# Altium PCB camera.PcbDoc
Units mm, origin at the board's own origin, x right, y up, seen from the top; angles counter-clockwise.
Board outline 85 x 80 mm, 4 copper layers (Top Layer, Gnd, DC Power, Bottom Layer), stack 1.782 mm thick; 98 components, 60 nets, 288 pads, 140 vias.
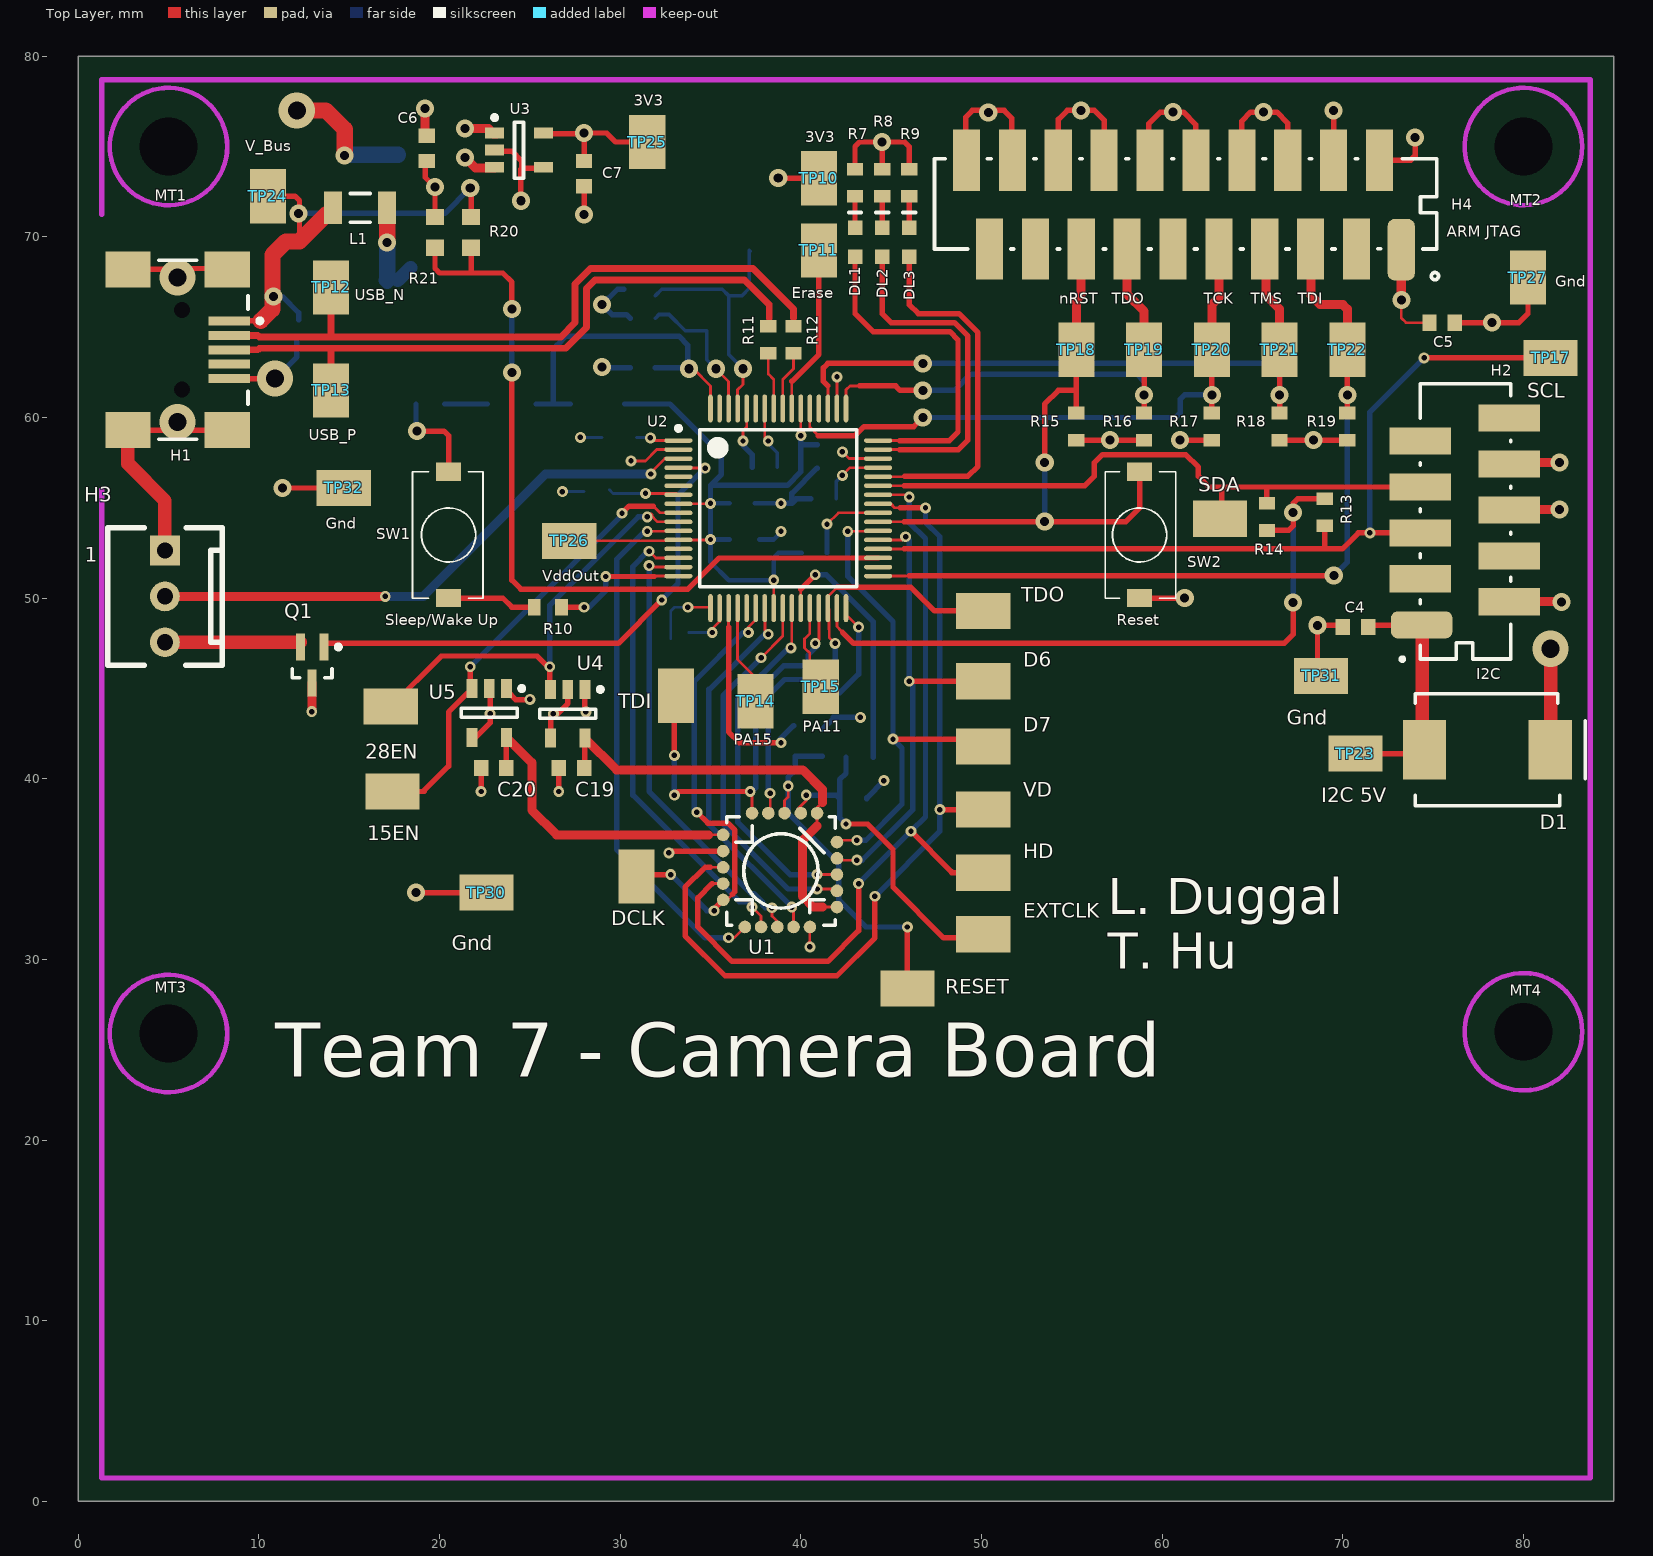
[diagram p0: Top Layer view]
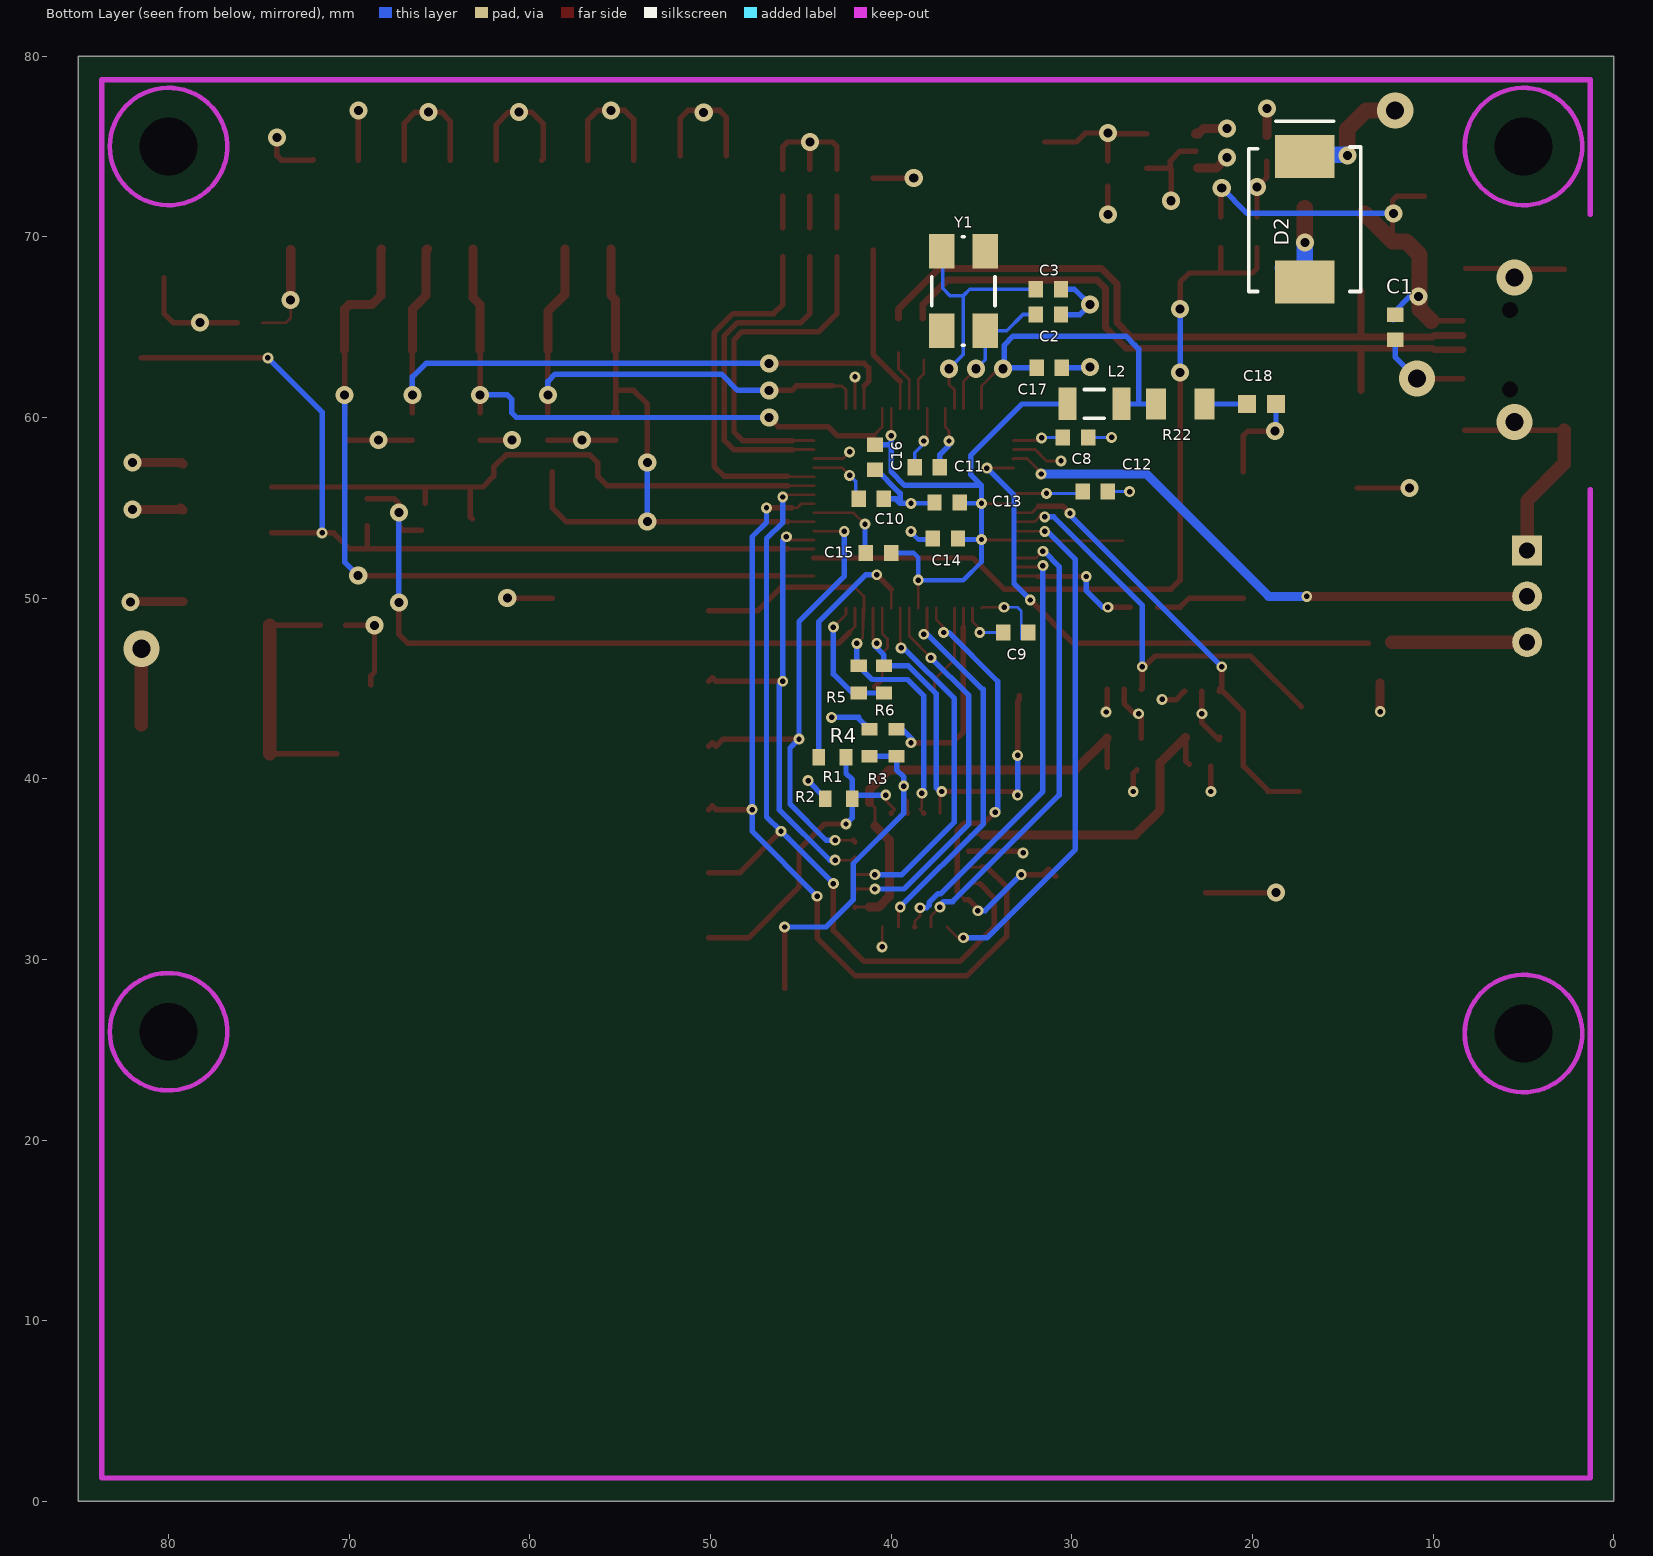
[diagram p1: Bottom Layer view, seen from below]
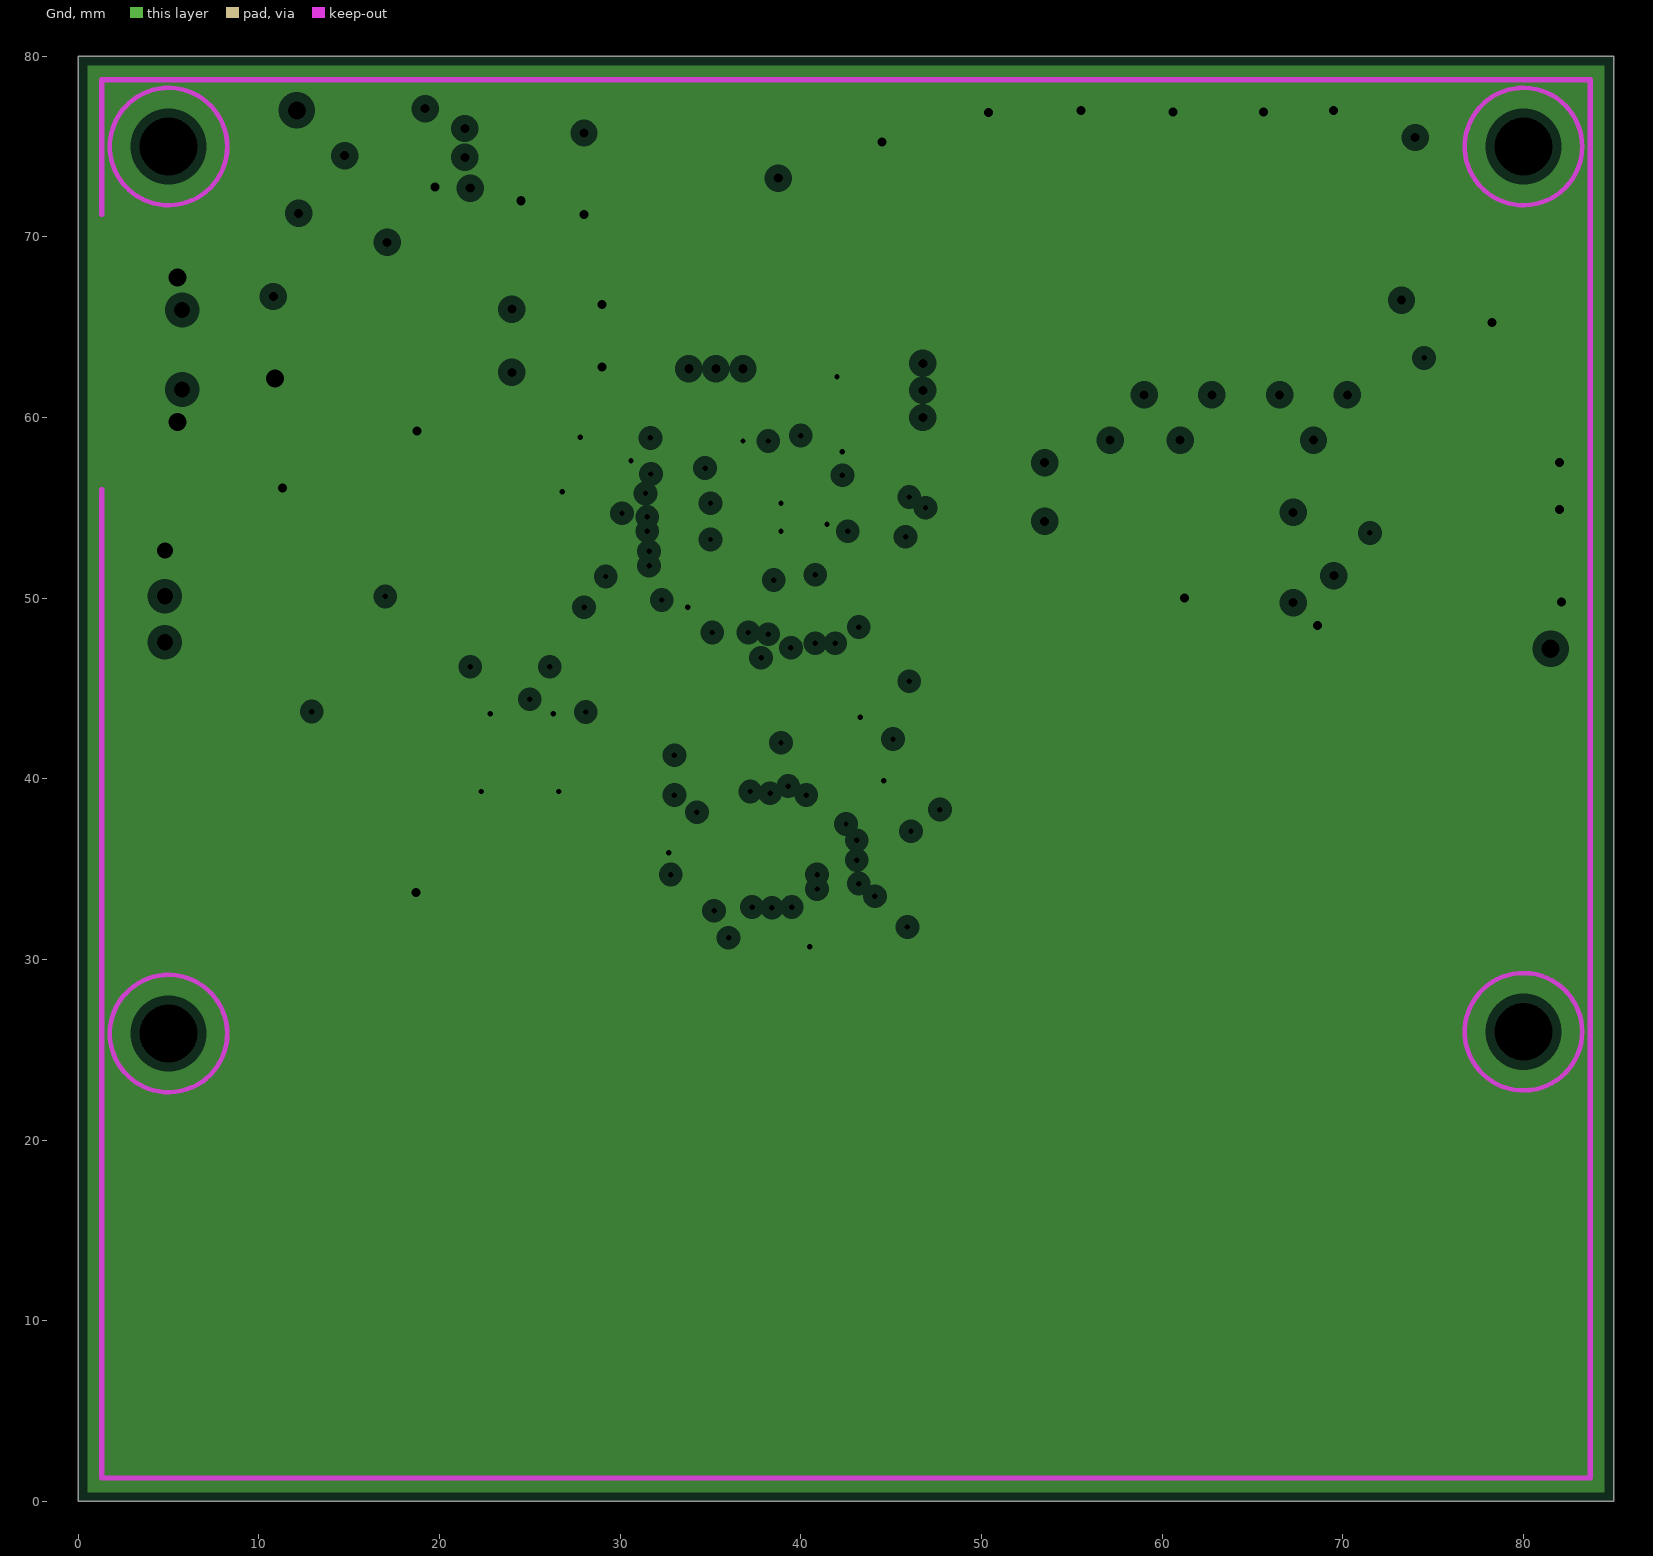
[diagram p2: Gnd, clearances drawn from the general rule]
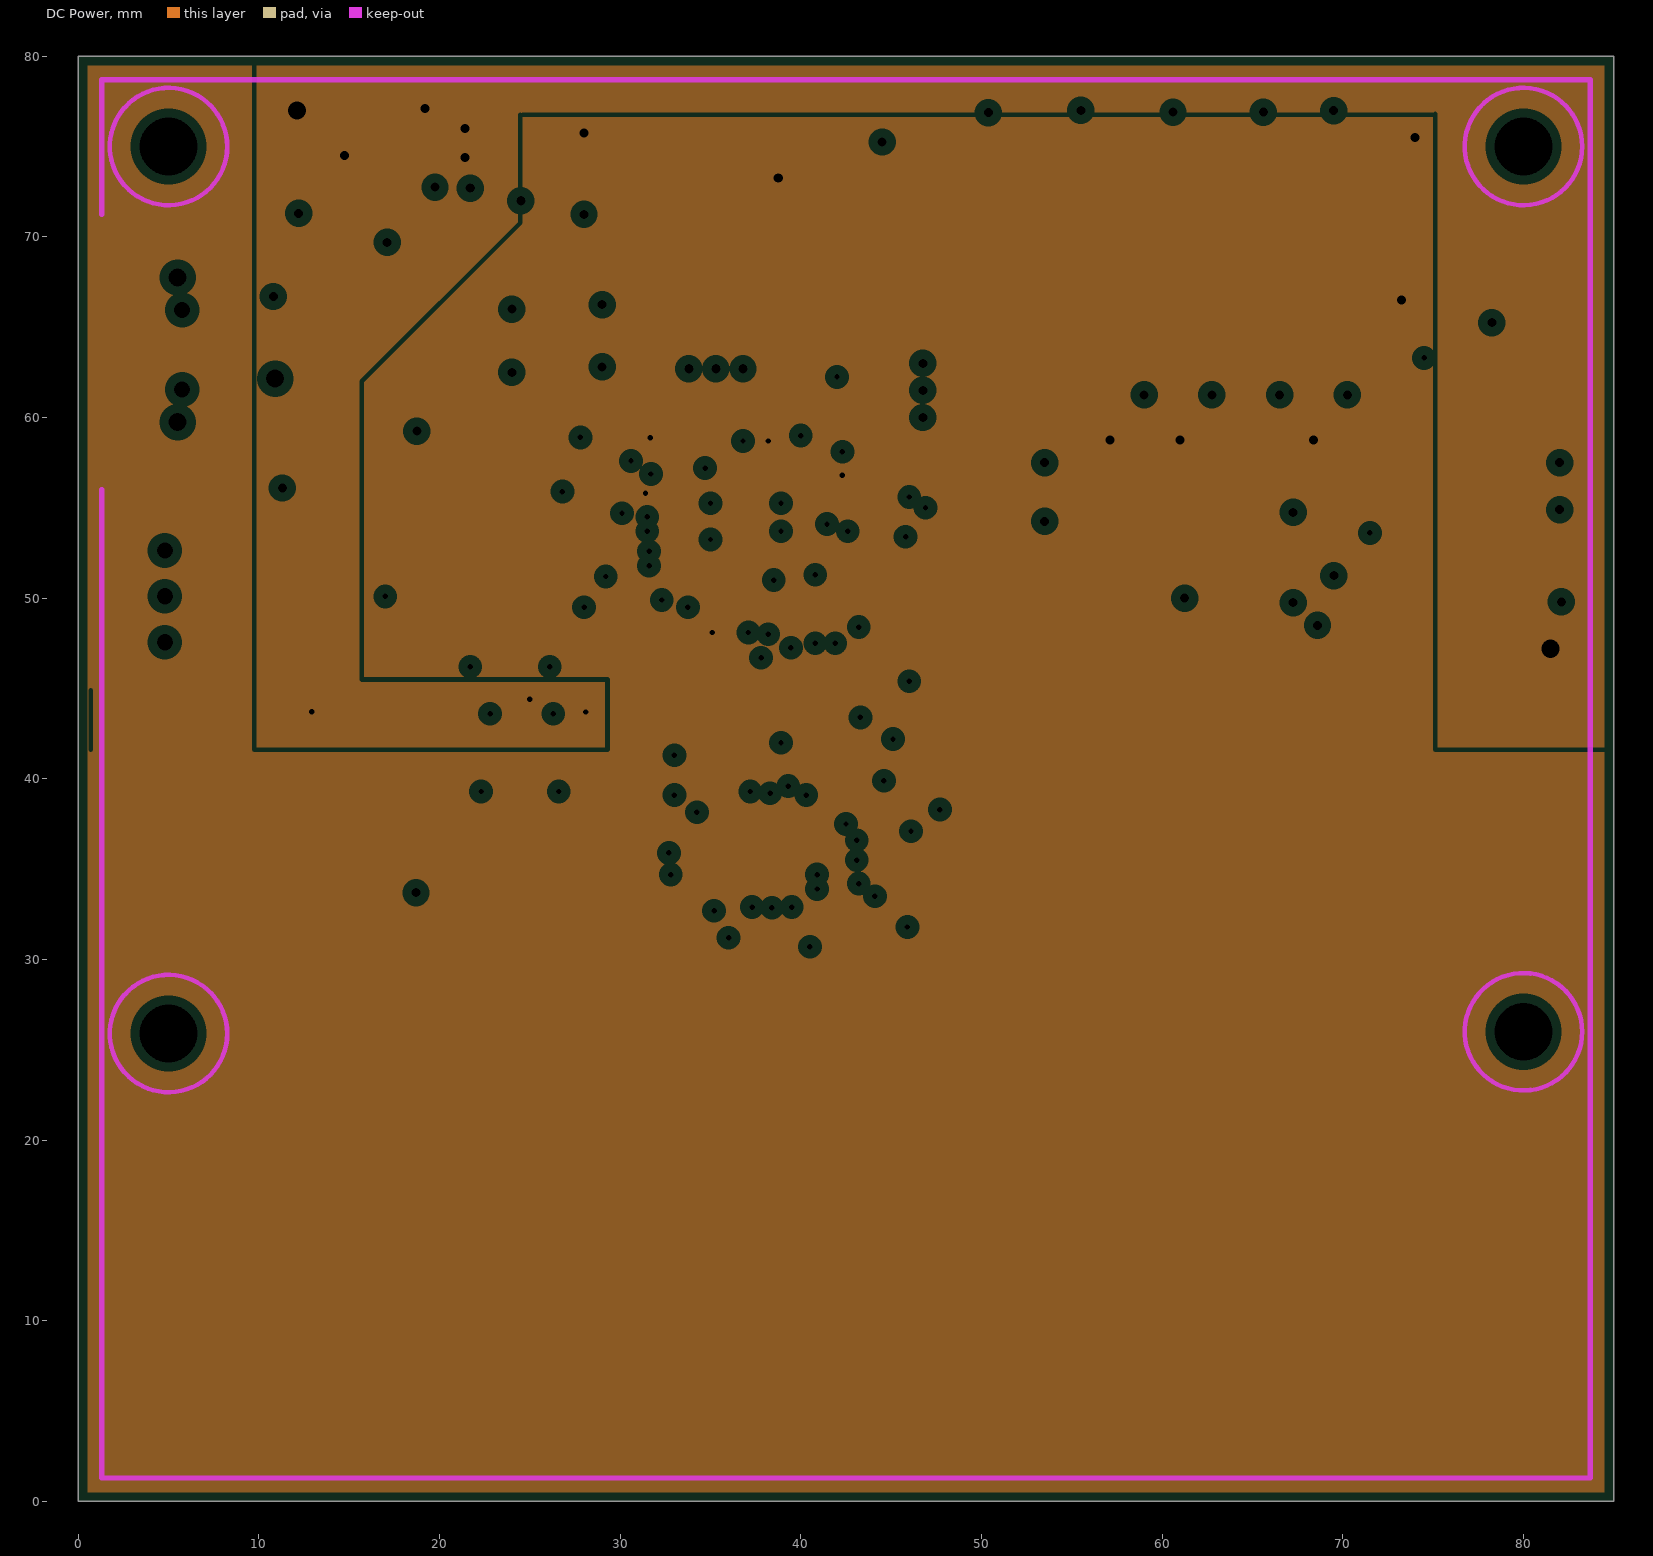
[diagram p3: DC Power, clearances drawn from the general rule]

## Layer stack, top to bottom
Top Solder: solder mask 0.0102, Solder Resist, Dk 3.5
Top Layer: signal copper 0.0356
Dielectric1: prepreg 0.32, FR-4, Dk 4.8
Gnd: plane copper 0.0356, net GND
Dielectric2: core 1, FR-4, Dk 4.8
DC Power: plane copper 0.0356, net (Multiple Nets)
Dielectric3: prepreg 0.32, FR-4, Dk 4.8
Bottom Layer: signal copper 0.0356
Bottom Solder: solder mask 0.0102, Solder Resist, Dk 3.5

## Board outline
0,0 85,0 85,80 0,80

## Design rules (kind name [scope] priority, off if disabled: settings)
Clearance Min_Clearance_Circuit_Labs [All] p1: gap=0.15
DiffPairsRouting [All] p1: maxlimit=0.254 minlimit=0.254 mostfreqgap=0.254 toplayer_minwidth=0.381 toplayer_maxwidth=0.381 toplayer_prefwidth=0.381 bottomlayer_minwidth=0.381 bottomlayer_maxwidth=0.381 bottomlayer_prefwidth=0.381 maxuncoupledlength=12.7
FanoutControl Fanout_BGA [IsBGA] p1 off: bgadir=Out bgaviamode=Centered fanoutstyle=Auto fanoutdirection=Alternating viagrid=0.025 // Fanout_BGA (Default Rule)
HoleSize [All] p1: absolutevalues=TRUE maxlimit=10 minlimit=0.3 maxpercent=80.000 minpercent=20.000
MinimumAnnularRing [All] p1: minimumring=0.1
MinimumSolderMaskSliver MinimumSolderMaskSliver_1 [(HasFootprint('USB/SM0.8-6H5') OR HasFootprint('SOT95P280X145-5N') OR HasFootprint('LQFP64_L'))] p1: minsoldermaskwidth=0.11
MinimumSolderMaskSliver [All] p2: minsoldermaskwidth=0.25
NetAntennae [All] p1: netantennaetolerance=1
PasteMaskExpansion [All] p1 off: expansion=0.2
PlaneClearance [All] p1: clearance=0.508
PlaneConnect [All] p1: planeconnectstyle=Relief reliefexpansion=0.508 reliefentries=4 reliefconductorwidth=0.254 reliefairgap=0.254
PolygonConnect [All] p1: connectstyle=Relief reliefconductorwidth=0.254 reliefentries=4 polygonreliefangle="90 Angle" airgapwidth=0.254
RoomDefinition Camera [InComponentClass('Camera')] p1: confinementstyle=ConfineIn formatcopy=TRUE lockcomponents=FALSE outline 1,3.9 87.1,3.9 87.1,51.4 1,51.4
RoomDefinition Camera_Board [InComponentClass('Camera_Board')] p2: confinementstyle=ConfineIn formatcopy=TRUE lockcomponents=FALSE outline -1.3,0.4 85.1,0.4 85.1,78.8 -1.3,78.8
RoomDefinition Power_Distribution [InComponentClass('Power_Distribution')] p3: confinementstyle=ConfineIn formatcopy=TRUE lockcomponents=FALSE outline 1,21.6 87,21.6 87,77.55 1,77.55
RoutingVias [All] p1: holewidth=0.5 width=1 viastyle="Through Hole" minholewidth=0.3 minwidth=0.6 maxholewidth=1 maxwidth=2
SMDNeckDown [All] p1 off: percent=50.000
SMDToCorner [All] p1: distance=98425
SMDToPlane [All] p1: distance=1968504
SilkToSolderMaskClearance SilkscreenOverComponentPads [IsPad] p1: minsilkscreentomaskgap=0.254 clearancetoexposedcopper=TRUE
SolderMaskExpansion [All] p1: expansion=0.102
ViasUnderSMD [All] p1: allowed=FALSE
Width [All] p1: maxlimit=2 minlimit=0.152 preferedwidth=0.3
21 further rules are at their usual default settings.

## Classes and differential pairs
component class Camera_Board: C1 C2 C3 C4 C5 DL1 DL2 DL3 H1 H2 H3 H4 MT1 MT2 MT3 MT4 Q1 R7 R8 R9 R10 R11 R12 R13 R14 R15 R16 R17 R18 R19 R20 R21 SDA SW1 SW2 TP10 TP11 TP12 TP13 TP14 TP15 TP17 TP18 TP19 TP20 TP21 TP22 Y1
component class Power_Distribution: C6 C7 C8 C9 C10 C11 C12 C13 C14 C15 C16 C17 C18 C19 C20 D1 D2 L1 L2 R22 TP23 TP24 TP25 TP26 TP27 TP28 TP29 TP30 TP31 TP32 U3 U4 U5
net class C1_Nets: GND VBUS
net class C2_Nets: GND NetC2_2
net class C3_Nets: GND NetC3_2
net class C4_Nets: +5V GND
net class C5_Nets: +3V3 GND
net class C6_Nets: +5IN GND
net class C7_Nets: +3V3 GND
net class C8_Nets: +3V3 GND
net class C9_Nets: +3V3 GND
net class C10_Nets: +3V3 GND
net class C11_Nets: +3V3 GND
net class C15_Nets: GND VDDOUT
net class C13_Nets: GND VDDOUT
net class C14_Nets: GND VDDOUT
net class C16_Nets: GND VDDOUT
net class DL1_Nets: LED1 NetDL1_1
net class DL2_Nets: LED2 NetDL2_1
net class DL3_Nets: LED3 NetDL3_1
net class H1_Nets: GND NetH1_4 USB_N USB_P VBUS
net class H2_Nets: +5V GND NetH2_3 NetH2_4 NetH2_9 NetH2_10 SCL SDA
net class H4_Nets: +3V3 GND NetH3_11 NetH3_17 NetH3_19 NRST TCK TDI TDO TMS
net class L1_Nets: NetD2_1 VBUS
net class L2_Nets: NetC17_2 VDDOUT
net class R7_Nets: GND NetDL1_1
net class R8_Nets: GND NetDL2_1
net class R3_Nets: NetR3_1 NetR3_2
net class R9_Nets: GND NetDL3_1
net class R5_Nets: NetR5_1 NetR5_2
net class R6_Nets: NetR5_2 NetR6_1
net class R15_Nets: +3V3 NRST
net class R16_Nets: +3V3 TDO
net class R17_Nets: +3V3 TCK
net class R18_Nets: +3V3 TMS
net class R19_Nets: +3V3 TDI
net class R14_Nets: NetR13_2 SDA
net class R21_Nets: GND "USB DETECT"
net class SW1_Nets: GND NetR10_2
net class SW2_Nets: GND NRST
net class TP10_Nets: +3V3
net class TP11_Nets: ERASE
net class TP12_Nets: USB_N
net class TP4_Nets: NetR3_1
net class TP13_Nets: USB_P
net class TP6_Nets: NetTP6_1
net class TP18_Nets: NRST
net class TP19_Nets: TDO
net class TP20_Nets: TCK
net class TP21_Nets: TMS
net class TP22_Nets: TDI
net class TP24_Nets: VBUS
net class TP25_Nets: +3V3
net class TP26_Nets: VDDOUT
net class TP32_Nets: GND
net class TP30_Nets: GND
net class U2_Nets: +3V3 ERASE GND LED1 LED2 LED3 NetC2_2 NetC3_2 NetC17_2 NetH3_2 NetR1_2 NetR3_2 NetR5_1 NetR5_2 NetR6_1 NetR10_1 NetR11_2 NetR12_2 NetR13_2 NetTP2_1 NetTP3_1 NetTP5_1 NetTP6_1 NetTP7_1 NetTP14_1 NetTP15_1 NetTP28_1 NetTP29_1 NetU1_3 NetU1_4 NetU1_5 NetU1_6 NetU1_9 NetU1_10 NetU1_11 NetU1_12 NetU1_13 NetU1_14 NetU1_15 NetU1_16 NetU1_17 NetU1_18 NetU1_19 NetU1_21 NetU1_22 NetU1_23 NetU1_25 NetU1_27 NetU1_29 NetU1_30 NetU1_32 NetU1_34 NetU1_37 NetU1_38 NetU1_41 NetU1_42 NetU1_52 NetU1_59 NetU1_63 NRST PWR SCL SDA TCK TDI TDO TMS "USB DETECT" VDDOUT
net class Y1_Nets: NetC2_2 NetC3_2
net class C17_Nets: GND NetC17_2
component class Camera: R1 R2 R3 R4 R5 R6 TDo TP1 TP2 TP3 TP4 TP5 TP6 TP7 TP9 U1
net class C12_Nets: +3V3 GND
net class C18_Nets: GND NetC18_2
net class C19_Nets: +2V8 GND
net class C20_Nets: +1V5 GND
net class D1_Nets: +5IN +5V
net class D2_Nets: +5IN NetD2_1
net class H3_Nets: GND NetH3_2 NetH3_3
net class Q1_Nets: +5IN NetH3_3 PWR
net class R1_Nets: NetR1_1 NetR1_2
net class R2_Nets: GND NetR1_1
net class R4_Nets: GND NetR3_1
net class R10_Nets: NetR10_1 NetR10_2
net class R11_Nets: NetR11_2 USB_P
net class R12_Nets: NetR12_2 USB_N
net class R13_Nets: NetR13_2 SCL
net class R20_Nets: "USB DETECT" VBUS
net class R22_Nets: NetC17_2 NetC18_2
net class TP1_Nets: NetR1_1
net class TP2_Nets: NetTP2_1
net class TP3_Nets: NetTP3_1
net class TP5_Nets: NetTP5_1
net class TP7_Nets: NetTP7_1
net class TP8_Nets: NetR5_1
net class TP9_Nets: NetR6_1
net class TP14_Nets: NetTP14_1
net class TP15_Nets: NetTP15_1
net class TP16_Nets: SDA
net class TP17_Nets: SCL
net class TP23_Nets: +5V
net class TP27_Nets: GND
net class TP28_Nets: NetTP28_1
net class TP29_Nets: NetTP29_1
net class TP31_Nets: GND
net class U1_Nets: +1V5 +2V8 GND NetR1_1 NetR3_1 NetR5_1 NetR6_1 NetTP2_1 NetTP3_1 NetTP5_1 NetTP6_1 NetTP7_1 NetU1_11 NetU1_12 NetU1_13 NetU1_14 NetU1_17 NetU1_18
net class U3_Nets: +3V3 +5IN GND
net class U4_Nets: +2V8 +5IN GND NetTP28_1
net class U5_Nets: +1V5 +5IN GND NetTP29_1
differential pair USB: +USB_P -USB_N

## Components (designator, comment, footprint, x,y, rotation, side; value= is the part's Value field where it differs from the comment)
15EN "Gnd" TP_0805 17.4,39.3 r0 top (schematic designator TP29)
28EN "Gnd" TP_0805 17.3,44 r0 top (schematic designator TP28)
C1 "100nF" CAPC1608L 12.1,65 r270 bottom
C2 "10pF" CAPC1608L 31.3,65.7 r0 bottom
C3 "10pF" CAPC1608L 31.3,67.1 r0 bottom
C4 "100nF" CAPC1608L 70.7,48.4 r0 top
C5 "100nF" CAPC1608L 75.5,65.25 r180 top
C6 "10uF" CAPC1608L 19.3,74.9 r270 top
C7 "10uF" CAPC1608L 28,73.5 r270 top
C8 "100nF" CAPC1608L 29.8,58.9 r0 bottom
C9 "100nF" CAPC1608L 33.1,48.1 r0 bottom
C10 "100nF" CAPC1608L 41.1,55.5 r0 bottom
C11 "100nF" CAPC1608L 38,57.25 r0 bottom
C12 "100nF" CAPC1608L 28.7,55.9 r0 bottom
C13 "100nF" CAPC1608L 36.9,55.3 r180 bottom
C14 "100nF" CAPC1608L 37,53.3 r180 bottom
C15 "100nF" CAPC1608L 40.7,52.5 r180 bottom
C16 "100nF" CAPC1608L 40.9,57.8 r90 bottom
C17 "100nF" CAPC1608L 31.25,62.75 r0 bottom
C18 "4.7uF" CAPC1608N 19.5,60.75 r0 bottom
C19 "10uF" CAPC1608L 27.3,40.6 r180 top
C20 "10uF" CAPC1608L 23,40.6 r180 top
D1 "VS-30BQ015TRPBF" SMC 78,41.6 r0 top
D2 "VS-30BQ015TRPBF" SMC 17.1,70.975 r90 bottom
D6 "PA11" TP_0805 50.1,45.4 r0 top (schematic designator TP2)
D7 "PA11" TP_0805 50.1,41.8 r0 top (schematic designator TP3)
DCLK "PA11" TP_0805 30.9,34.6 r90 top (schematic designator TP7)
DL1 "Dark Green" WL-SMCW0603 43,70.5 r270 top
DL2 "Yellow" WL-SMCW0603 44.5,70.5 r270 top
DL3 "Red" WL-SMCW0603 46,70.5 r270 top
EXTCLK "PA11" TP_0805 50.1,31.4 r0 top (schematic designator TP1)
H1 "JS_USB_MINI_B" USB/SM0.8-6H5 0.5,63.75 r180 top
H2 "I2C" 188275-10 76.75,54.25 r90 top
H3 "3 Pin Molex KK Hdr" MOLEX_KK_3_HDR 4.8,52.64 r270 top
H4 "ARM JTAG" 188275-20 61.235,71.789 r180 top
HD "PA11" TP_0805 50.1,34.8 r0 top (schematic designator TP6)
L1 "Ferrite Bead" INDC3216L 15.6,71.6 r0 top
L2 "Ferrite Bead" INDC3216L 28.75,60.75 r0 bottom
MT1 "M3.2 NPTH" MNT-HOLE_3.2mm_NPTH 5,75 r0 top
MT2 "M3.2 NPTH" MNT-HOLE_3.2mm_NPTH 80,75 r0 top
MT3 "M3.2 NPTH" MNT-HOLE_3.2mm_NPTH 5,25.9 r0 top
MT4 "M3.2 NPTH" MNT-HOLE_3.2mm_NPTH 80,26 r0 top
Q1 "BC817W" SOT323_M 12.95,46.3 r270 top
R1 "10R" RESC1608L 43.25,41.2 r0 bottom
R2 "50R" RESC1608L 42.9,38.9 r180 bottom
R3 "10R" RESC1608L 39.7,42 r90 bottom
R4 "50R" RESC1608L 41.2,42 r270 bottom
R5 "2K2" RESC1608L 41.8,45.5 r270 bottom
R6 "2K2" RESC1608L 40.4,45.5 r270 bottom
R7 "62R" RESC1608L 43,73 r90 top
R8 "220R" RESC1608L 44.5,73 r90 top
R9 "220R" RESC1608L 46,73 r90 top
R10 "2K2" RESC1608L 26,49.5 r180 top
R11 "27R" RESC1608L 38.2,64.3 r270 top
R12 "27R" RESC1608L 39.6,64.3 r270 top
R13 "2K2" RESC1608L 69,54.75 r90 top
R14 "2K2" RESC1608L 65.8,54.5 r270 top
R15 "100K" RESC1608L 55.25,59.5 r270 top
R16 "100K" RESC1608L 59,59.5 r270 top
R17 "100K" RESC1608L 62.75,59.5 r270 top
R18 "100K" RESC1608L 66.5,59.5 r270 top
R19 "100K" RESC1608L 70.25,59.5 r270 top
R20 "27K" RESC1608N 21.75,70.25 r90 top
R21 "47K" RESC1608N 19.75,70.25 r270 top
R22 "1R" RESC3216L 24,60.75 r0 bottom
RESET "PA11" TP_0805 45.9,28.4 r0 top (schematic designator TP4)
SDA "PA11" TP_0805 63.2,54.4 r0 top (schematic designator TP16)
SW1 "Sleep/Wake Up" KSR211G 20.5,50 r90 top
SW2 "Reset" KSR211G 58.75,57 r270 top
TDI "PA11" TP_0805 33.1,44.6 r90 top (schematic designator TP9)
TDO "PA11" TP_0805 50.1,49.3 r0 top (schematic designator TP8)
TP10 "3V3" TP_0805 41,73.25 r90 top
TP11 "Erase" TP_0805 41,69.25 r90 top
TP12 "USB_N" TP_0805 14,67.2 r90 top
TP13 "USB_P" TP_0805 14,61.5 r90 top
TP14 "PA15" TP_0805 37.5,44.3 r90 top
TP15 "PA11" TP_0805 41.1,45.1 r90 top
TP17 "SCL" TP_0805 81.5,63.3 r0 top
TP18 "nRST" TP_0805 55.25,63.75 r90 top
TP19 "TDO" TP_0805 59,63.75 r90 top
TP20 "TCK" TP_0805 62.75,63.75 r90 top
TP21 "TMS" TP_0805 66.5,63.75 r90 top
TP22 "TDI" TP_0805 70.25,63.75 r90 top
TP23 "I2C 5V" TP_0805 70.7,41.4 r0 top
TP24 "V_Bus" TP_0805 10.5,72.25 r90 top
TP25 "3V3" TP_0805 31.5,75.25 r270 top
TP26 "VddOut" TP_0805 27.176,53.174 r0 top
TP27 "Gnd" TP_0805 80.25,67.75 r90 top
TP30 "Gnd" TP_0805 22.6,33.7 r0 top
TP31 "Gnd" TP_0805 68.8,45.7 r0 top
TP32 "Gnd" TP_0805 14.7,56.1 r0 top
U1 "TCM8230MD" TCM8230MD 41.9,37.9 r270 top
U2 "ATSAM4S8BA-ANR" LQFP64_L 38.75,54.975 r0 top
U3 "TLV70233DBVR" SOT95P280X145-5N 24.4,74.8 r0 top
U4 "TPS78228DDCR" SOT95P280X145-5N 27.1,43.6 r270 top
U5 "TPS73115DBVR" SOT95P280X145-5N 22.75,43.65 r270 top
VD "PA11" TP_0805 50.1,38.3 r0 top (schematic designator TP5)
Y1 "18.432 MHz" 6.0X3.5-4 36,67 r270 bottom

## Footprints (in the part's own frame and the unit in brackets; to place one, negate y for a bottom-side part, rotate by r counter-clockwise, add the part's x,y. Pads: shape width x height; smd on the part's side, far side on the other; paste and mask are expansions set on the pad)
6.0X3.5-4 [mm] "4 SMD 6.0X3.5 mm No Lead Crystal"
  rect 1.9x1.4 smd: 1(-2.2,-1.2) 2(2.2,-1.2) 3(2.2,1.2) 4(-2.2,1.2)
  silkscreen extent -3,-1.75 3,1.75, body extent -3,-1.75 3,1.75, height 1.2
188275-10 [mm] "MicroMatch Ribbon Connector 10 way"
  rrect50% 1.5x3.4 smd: 1(-5.724,2.385)
  rect 1.5x3.4 smd: 2(-4.445,-2.461) 3(-3.175,2.461) 4(-1.905,-2.461) 5(-0.635,2.461) 6(0.635,-2.461) 7(1.905,2.461) 8(3.175,-2.461) 9(4.445,2.461) 10(5.715,-2.461)
  silkscreen extent -7.74,-2.55 7.62,3.57, body extent -7.62,-2.5 7.64,2.43, height 8.45
188275-20 [mm] "MicroMatch Ribbon Connector 20 way"
  rrect50% 1.5x3.4 smd: 1(-12,2.5)
  rect 1.5x3.4 smd: 2(-10.795,-2.461) 3(-9.525,2.461) 4(-8.255,-2.461) 5(-6.985,2.461) 6(-5.715,-2.461) 7(-4.445,2.461) 8(-3.175,-2.461) 9(-1.905,2.461) 10(-0.635,-2.461) 11(0.635,2.461) 12(1.905,-2.461) 13(3.175,2.461) 14(4.445,-2.461) 15(5.715,2.461) 16(6.985,-2.461) 17(8.255,2.461) 18(9.525,-2.461) 19(10.795,2.461) 20(12.065,-2.461)
  silkscreen extent -14.06,-2.54 13.83,4.16, body extent -13.96,-2.54 13.93,2.46, height 8.45
CAPC1608L [mm] "Chip Capacitor, Body 1.6x0.8mm, IPC High Density"
  rect 0.8x0.9 smd: 1(-0.7,0) 2(0.7,0)
  body extent -0.87,-0.48 0.87,0.48, height 0.85
CAPC1608N [mm] "Chip Capacitor, Body 1.6x0.8mm, IPC Medium Density"
  rect 1x1 smd: 1(-0.8,0) 2(0.8,0)
  body extent -0.87,-0.48 0.87,0.48, height 0.85
INDC3216L [mm] "Chip Inductor, Body 3.2x1.6mm, IPC High Density"
  rect 1x1.8 smd: 1(-1.5,0) 2(1.5,0)
  silkscreen extent -0.55,-0.8 0.55,0.8, body extent -1.75,-0.95 1.75,0.95, height 1.9
KSR211G [mm] "Subminature Tactile Switch in SMT"
  rect 1x1.4 smd: 1(0,0) 2(7,0)
  silkscreen extent 0,-1.9 7,2, body extent 0,-1.9 7,2, height 4.25
LQFP64_L [mm] "Thin QFP, 64-Leads, Body 10x10mm, Pitch 0.5mm, IPC High Density"
  oval 1.55x0.25 smd mask+0.07: 1(-5.525,3.75) 2(-5.525,3.25) 3(-5.525,2.75) 4(-5.525,2.25) 5(-5.525,1.75) 6(-5.525,1.25) 7(-5.525,0.75) 8(-5.525,0.25) 9(-5.525,-0.25) 10(-5.525,-0.75) 11(-5.525,-1.25) 12(-5.525,-1.75) 13(-5.525,-2.25) 14(-5.525,-2.75) 15(-5.525,-3.25) 16(-5.525,-3.75) 33(5.525,-3.75) 34(5.525,-3.25) 35(5.525,-2.75) 36(5.525,-2.25) 37(5.525,-1.75) 38(5.525,-1.25) 39(5.525,-0.75) 40(5.525,-0.25) 41(5.525,0.25) 42(5.525,0.75) 43(5.525,1.25) 44(5.525,1.75) 45(5.525,2.25) 46(5.525,2.75) 47(5.525,3.25) 48(5.525,3.75)
  oval 0.25x1.55 smd mask+0.07: 17(-3.75,-5.525) 18(-3.25,-5.525) 19(-2.75,-5.525) 20(-2.25,-5.525) 21(-1.75,-5.525) 22(-1.25,-5.525) 23(-0.75,-5.525) 24(-0.25,-5.525) 25(0.25,-5.525) 26(0.75,-5.525) 27(1.25,-5.525) 28(1.75,-5.525) 29(2.25,-5.525) 30(2.75,-5.525) 31(3.25,-5.525) 32(3.75,-5.525) 49(3.75,5.525) 50(3.25,5.525) 51(2.75,5.525) 52(2.25,5.525) 53(1.75,5.525) 54(1.25,5.525) 55(0.75,5.525) 56(0.25,5.525) 57(-0.25,5.525) 58(-0.75,5.525) 59(-1.25,5.525) 60(-1.75,5.525) 61(-2.25,5.525) 62(-2.75,5.525) 63(-3.25,5.525) 64(-3.75,5.525)
  silkscreen extent -5.65,-4.35 4.35,4.55, body extent -5,-5 5,5, height 1.6
MNT-HOLE_3.2mm_NPTH [mm] "Mounting Hole 3.2mm non plated"
  round 0 hole 3.2 unplated: 1(0,0)
  Keep-Out Layer circle w0.254: c0,0 r3.25
MOLEX_KK_3_HDR [mil] "MOLEX_KK_3_HDR"
  rect 65x65 hole 35.43: 1(0,0)
  round 65 hole 35.43: 2(100,0) 3(200,0)
  silkscreen extent -50,-125 250,125, body extent -44,-120 244,119, height 630
RESC1608L [mm] "Chip Resistor, Body 1.6x0.8mm, IPC High Density"
  rect 0.7x0.9 smd: 1(-0.75,0) 2(0.75,0)
  body extent -0.85,-0.48 0.85,0.48, height 0.9
RESC1608N [mm] "Chip Resistor, Body 1.6x0.8mm, IPC Medium Density"
  rect 0.9x1 smd: 1(-0.85,0) 2(0.85,0)
  body extent -0.85,-0.48 0.85,0.48, height 0.6
RESC3216L [mm] "Chip Resistor, Body 3.1x1.6mm, IPC High Density"
  rect 1.1x1.7 smd: 1(-1.35,0) 2(1.35,0)
  body extent -1.68,-0.87 1.68,0.87, height 2.54
SMC [mm] "DO-214-AB/SMC; 2 C-Bend Leads; Body 7.9 x 5.9 mm, inc. leads (LxW)"
  rect 2.4x3.3 smd: 1(-3.475,0) 2(3.475,0)
  silkscreen extent -4,-3.1 5.43,3.1
SOT95P280X145-5N [mm] "SOT23, 5-Leads, Body 2.90x2.80mm, Pitch 0.95mm, IPC Medium Density"
  rect 1.05x0.6 smd: 1(-1.35,0.95) 2(-1.35,0) 3(-1.35,-0.95) 4(1.35,-0.95) 5(1.35,0.95)
  silkscreen extent -1.47,-1.55 0.25,1.92, body extent -0.87,-1.52 0.87,1.53, height 1.45
SOT323_M [mm] "SOT323, 3-Leads, Body 2.0x1.3mm, Pitch 0.65mm, Lead Span 2.1mm, IPC Low Density"
  rect 1.5x0.5 smd: 1(-1,0.65) 2(-1,-0.65) 3(1,0)
  silkscreen extent -1.12,-1.1 0.7,1.58, body extent -0.7,-1.1 0.7,1.1, height 1.1
TCM8230MD [mm] "Toshiba VGA Camera Module"
  round 0.7 smd mask+0.04: 1(-0.2,-1) 2(-0.2,-1.9) 3(-0.2,-2.8) 4(-0.2,-3.7) 5(-0.2,-4.6) 6(1,-6.2) 7(1.9,-6.2) 8(2.8,-6.2) 9(3.7,-6.2) 10(4.6,-6.2) 11(6.1,-5) 12(6.1,-4.1) 13(6.1,-3.2) 14(6.1,-2.3) 15(6.1,-1.4) 16(5,0.1) 17(4.1,0.1) 18(3.2,0.1) 19(2.3,0.1) 20(1.4,0.1)
  silkscreen extent 0,-6 6,0, body extent 0,-6 6,0, height 4.5
TP_0805 [mm] "TestPoint SMD"
  rect 3x2 smd: 1(0,0)
  body extent -1.5,-1 1.5,1.1, height 1.4
USB/SM0.8-6H5 [mm] "Connector; USB2.0, Type B, SM; 5 Position; Right Angle"
  rect 2.3x0.5 smd mask+0.07: 1(-7.85,-1.6) 2(-7.85,-0.8) 3(-7.85,0) 4(-7.85,0.8) 5(-7.85,1.6)
  rect 2.5x2 smd: 6(-7.75,4.45) 7(-2.25,4.45) 8(-7.75,-4.45) 9(-2.25,-4.45)
  round 0.6 hole 0.9 unplated: MH1(-5.25,2.2) MH2(-5.25,-2.2)
  silkscreen extent -9.68,-4.95 -3.95,4.95, body extent -8.9,-4.95 0.7,4.95, height 3.9
WL-SMCW0603 [mm] "2.4 x 0.8 x 0.7mm LED"
  rect 0.8x0.8 smd: 1(0,0) 2(1.6,0)
  silkscreen extent -0.85,-0.35 -0.85,0.35

## Part data
15EN 28EN D6 D7 DCLK EXTCLK HD RESET SDA TDI TDO TP10 TP11 TP12 TP13 TP14 TP15 TP17 TP18 TP19 TP20 TP21 TP22 TP23 TP24 TP25 TP26 TP27 TP30 TP31 TP32 VD: library part TP_0805, "Test Point 2.0X0.9X1.2mm SMD"
C1 C4 C5 C8 C9 C10 C11 C12 C13 C14 C15 C16 C17: library part CC_100nF_0603, "CAP CER 100nF X7R +-10% 50V 0603"
C2 C3: library part CC_10pF_0603, "CAP CER 10pF COG/NPO 50V 0603"
C6 C7 C19 C20: library part CC_10uF_0603, "CAP CER 10UF X5R +-20% 10V 0603"
C18: library part CC_4.7uF_0603, "CAP CER 4.7uF X5R +-20%  10V 0603"
D1 D2: library part DS_VS-30BQD015TRPBF, "DIODE SCHOTTKY 15V 3A SMC"
DL1: library part DL_150060GS75000, "LED Dk Green 430mcd 0603 SMD"
DL2: library part DL_150060YS75000, "LED Yellow 120mcd 0603 SMD"
DL3: library part DL_150060RS75000, "LED Red 250mcd 0603 SMD"
H1: library part JS_USB_MINI_B_SMT, "USB 2.0, Right Angle, SMT, B Type, Receptacle, 5 Position,"
H2: library part JB_HDR_IDC_5X2_VERT, "IDC Header, 1,27mm, 10-Pin, Vert, SMT"
H3: library part JA_MOLEX_KK_3POS, "CONN HEADER 3POS 2.54mm VERT_Thru Hole"
H4: library part JB_HDR_IDC_10X2_VERT, "IDC Header, 1,27mm, 20-Pin, Vert, SMT"
L1 L2: library part IN_Ferrite-Bead, "Ferrite Bead, Rdc 0.3R, Z100MHZ 600R, Imax 1A, SMD 1206"
MT1 MT2 MT3 MT4: library part MC_M3.2_HOLE, "Fixing M3.2 Mount Hole NPTH"
Q1: library part TB_BC817W, "NPN GP Bipolar Transistor 45V 500mA SOT323"
R1 R2 R3 R4 R5 R6 R10 R13 R14: library part RS_2K2, "RES 2.2K OHM 1/10W 5% 0603 SMD"
R7: library part RS_62R, "RES 62 OHM 1/10W 5% 0603 SMD"
R8 R9: library part RS_220R, "RES 220 OHM 1/10W 5% 0603 SMD"
R11 R12: library part RS_27R, "RES 27 OHM 1/10W 5% 0603 SMD"
R15 R16 R17 R18 R19: library part RS_100K, "RES 100K OHM 1/10W 5% 0603 SMD"
R20: library part RS_27K, "RES 27K OHM 1/10W 5% 0603 SMD"
R21: library part RS_47K, "RES 47.0K OHM 1/10W 5% 0603 SMD"
R22: library part RT_1R, "RES 1R OHM 1/4W 5% 1206 SMD"
SW1 SW2: library part "WS_KSR211G LFS", "SWITCH TACTILE SPST-NO SMD"
U1: "Toshiba I2C Camera"
U2: library part SE_ATSAM4S16BA-MU, "IC MCU 32BIT 512KB FLASH 64LQFP"
U3: library part SV_TLV70233DBVR, "IC REG LDO 3.3V 0.3A SOT23-5"
U4: library part SV_TLV70233DBVR, "IC REG LDO 2.8V 0.3A SOT23-5"
U5: library part SV_TLV70233DBVR, "IC REG LDO 1.5V 0.3A SOT23-5"
Y1: library part XT_CRYSTAL_18.432MHz_13pF, "18.432 MHZ 4PF  6.0X3.5mm SMD"

## Via types
v1: diameter 0.6, hole 0.3, Top Layer to Bottom Layer, 78 vias
v2: diameter 1, hole 0.5, Top Layer to Bottom Layer, 52 vias
v3: diameter 2, hole 1, Top Layer to Bottom Layer, 5 vias
v4: diameter 0.6, hole 0.3, Top Layer to Bottom Layer, tented top, 5 vias

## Nets (pads, with @x,y where several pads share a name; then routed paths per layer and width w, separated by ;. In a path a pad name is that pad's centre, name@x,y a point inside that pad or via, vN(x,y) a via of type N, cw(c..) or ccw(c..) an arc to the next point about the centre after c; other vN are vias at no path point)
+1V5: C20.1 U1.6 U5.5 | length 17.4
  Top Layer w0.152: 34.9,36.9 U1.6
  Top Layer w0.3: C20.1@23.5,40.8 23.7,41 U5.5
  Top Layer w0.5: U5.5 25.11,40.89 25.11,38.267 26.477,36.9 34.9,36.9
+2V8: C19.1 U1.1 U1.16 U4.5 | length 24.2
  Top Layer w0.152: 40.9,37.4 U1.1 40.9,38.4 41.2,38.7 ; 41.393,32.9 U1.16
  Top Layer w0.3: C19.1@28.05,40.65 U4.5
  Top Layer w0.5: U4.5 29.8,40.5 40.1,40.5 41.2,39.4 41.2,38.7 ; 40.9,37.4 40.1,36.6 40.1,33.5 40.7,32.9 41.2,32.9
+3V3: C5.2 C7.1 C8.2 C9.2 C10.2 C11.2 C12.2 H4.1 H4.2 R15.2 R16.2 R17.2 R18.2 R19.2 TP10.1 TP25.1 U2.1 U2.7 U2.18 U2.45 U2.58 U3.5 | length 44.1
  Top Layer w0.152: v1(31.4,55.8) 33.15,55.8 U2.7 ; v1(31.673,58.873) 31.821,58.725 U2.1 ; v1(35.1,48.1) 34.9,48.1 35.5,48.7 U2.18 ; U2.58 38,58.9 v1(38.2,58.7) ; v1(42.3,56.8) 42.725,57.225 U2.45 ; v2@73.235,66.515 73.235,65.515 73.5,65.25 C5.2
  Top Layer w0.3: U3.5@25.85,75.7 27.95,75.7 v2(28,75.75) ; C7.1 v2(28,75.75) ; TP25.1 29.75,75.25 29.25,75.75 v2(28,75.75) ; v2(38.75,73.25) TP10.1 ; R15.2 v2(57.125,58.75) R16.2 ; v2(61,58.75) R17.2 ; R18.2 v2(68.375,58.75) R19.2 ; H4.2@72,74.28 H4.2 73.75,74.25 74,74.5 v2(74,75.5) ; H4.1 H4.1@73.274,69.25
  Top Layer w0.5: v2@73.235,66.515 H4.1
  Bottom Layer w0.152: C12.2@29.4,56 29.6,55.8 v1(31.4,55.8) ; C8.2@30.9,58.9 v1@31.7,58.9 ; C9.2 v1(35.1,48.1)
  Bottom Layer w0.2: v1(38.2,58.7) 38.2,58.55 38.7,58.05 C11.2 ; C10.2@41.95,55.5 41.95,56.45 v1(42.3,56.8)
  other v2: 73.25,66.5
+5IN: C6.1 D1.2 D2.2 Q1.3 U3.1 U3.3 U4.1 U5.1 | length 21.3
  Top Layer w0.3: v1(12.925,43.725) v1@12.95,43.75 ; U5.1@23.75,44.85 24.227,44.373 24.973,44.373 v1(25,44.4) ; U4.1 28.05,43.75 v1(28.1,43.7)
  Top Layer w0.5: v1@12.95,43.75 Q1.3 ; C6.1@19.2,75.6 v2(19.2,77.1) ; v2(21.4,74.4) 22,73.8 U3.3@23.05,73.8 ; v2(21.4,76) 22.7,76 23,75.7 U3.1 23.1,75.75 U3.1@23.15,75.7
  Top Layer w0.75: D1.2@81.5,43 v3(81.5,47.2)
  Top Layer w0.9: v3(12.1,77) 13.7,77 14.75,75.95 v2(14.75,74.5)
  Bottom Layer w0.75: v2(14.75,74.5) v2@14.8,74.55
  Bottom Layer w0.9: v2@14.8,74.55 D2.2@17.7,74.55
+5V: C4.2 D1.1 H2.1 TP23.1 | length 13.6
  Top Layer w0.3: TP23.1 D1.1@74.4,41.4 ; C4.2@71.6,48.5 H2.1@74.4,48.5
  Top Layer w0.75: D1.1@74.4,41.4 H2.1@74.4,48.5
ERASE: TP11.1 U2.55 | length 9.4
  Top Layer w0.152: U2.55 39.5,62
  Top Layer w0.3: 39.5,62 41,63.5 TP11.1
GND: C1.2 C2.1 C3.1 C4.1 C5.1 C6.2 C7.2 C8.1 C9.1 C10.1 C11.1 C12.1 C13.1 C14.1 C15.1 C16.1 C17.1 C18.1 C19.2 C20.2 H1.5 H1.6 H1.7 H1.8 H1.9 H2.2 H2.6 H2.8 H3.1 H4.4 H4.6 H4.8 H4.10 H4.12 H4.14 H4.16 H4.18 H4.20 R2.1 R4.1 R7.2 R8.2 R9.2 R21.1 SW1.2 SW2.2 TP27.1 TP30.1 TP31.1 TP32.1 U1.7 U1.15 U2.2 U2.17 U2.40 U2.46 U2.50 U2.60 U3.2 U3.4 U4.2 U4.4 U5.2 U5.4 | length 157.9
  Top Layer w0.152: v1(30.6,57.6) 31.4,57.6 32.025,58.225 U2.2 ; v1(33.75,49.5) 34.95,49.5 U2.17 ; v1(36.8,58.7) 36.8,59.265 37,59.465 U2.60 ; v1@40.5,30.9 U1.15 ; v1(41.45,54.1) 42.075,54.725 U2.40 ; U2.50 v1(42,62.25) ; v1(42.3,58.1) 42.675,57.725 U2.46
  Top Layer w0.3: H1.7 4.8,59.3 5.25,59.75 v3(5.5,59.75) 5.75,59.75 6.2,59.3 H1.6 ; H1.9 5.05,68.2 v3(5.5,67.75) 6,68.25 H1.8@8.2,68.25 ; H1.5 v3(10.9,62.15) ; v2(11.3,56.1) TP32.1@14.2,56.1 ; v2(18.7,33.7) TP30.1 ; v2(18.75,59.25) 20.25,59.25 20.5,59 SW1.2 ; C6.2@19.2,74.2 19.2,73.3 v2(19.75,72.75) R21.1 ; U5.4 U5.4@21.9,42.2 ; U5.4@21.85,42.15 U5.4@21.9,42.2 ; v1(22.3,39.3) C20.2@22.3,40.7 ; U5.2@22.8,44.85 v1(22.8,43.6) 22.8,43.1 U5.4@21.9,42.2 ; U3.2@23.15,74.75 24,74.75 24.55,74.2 24.55,73.8 U3.4@25.85,73.8 ; v2(24.5,72) 24.5,73.75 ; U4.4 26.15,43.45 v1(26.3,43.6) 26.525,43.6 27.1,44.175 U4.2 ; C19.2@26.4,40.5 26.6,40.3 v1(26.6,39.3) ; v2(28,71.25) C7.2 ; v1(32.7,35.9) 32.8,36 U1.7 ; v1(40.5,30.7) v1@40.5,30.9 ; R7.2 43,75 43.25,75.25 v2(44.5,75.25) ; R8.2 v2(44.5,75.25) ; R9.2 46,75 45.75,75.25 v2(44.5,75.25) ; H4.20@49.13,74.5 49.13,76.63 49.5,77 v2@50.375,77 ; v2(50.375,76.875) v2@50.375,77 ; H4.18@51.67,74.5 51.67,76.58 51.25,77 v2@50.375,77 ; H4.16 54.25,76.5 54.75,77 v2(55.5,77) 56.25,77 56.79,76.46 H4.14 ; SW2.2 v2(61.25,50) ; H4.12 59.25,74.33 59.25,76.25 59.9,76.9 v2(60.6,76.9) 61.17,76.9 61.87,76.2 H4.10 ; H4.8 64.41,76.41 64.9,76.9 v2(65.6,76.9) 66.35,76.9 66.95,76.3 H4.6 ; TP31.1@68.8,45.2 TP31.1 68.6,45.9 v2(68.6,48.5) C4.1@70.2,48.5 ; H4.4 v2(69.49,76.99) ; C5.1 v2(78.25,65.25) 79.75,65.25 80.25,65.75 TP27.1
  Top Layer w0.5: H2.2 v2@81.695,49.805 ; H2.6 79.326,55 79.426,54.9 v2(82,54.9) ; H2.8 79.286,57.5 v2(82,57.5)
  Top Layer w0.746: H3.1 4.8,55.4
  Top Layer w0.75: H1.7 2.75,57.45 4.8,55.4
  Bottom Layer w0.152: v1(26.8,55.9) C12.1 ; v1(27.8,58.9) C8.1@29,58.9 ; C9.1@32.8,47.75 32.8,49.3 33,49.5 v1(33.75,49.5)
  Bottom Layer w0.254: C13.1@37.45,55.25 v1(38.9,55.25) ; C14.1@37.7,53.25 38.5,53.25 38.9,53.65 v1(38.9,53.7) ; C15.1@41.45,52.5 v1(41.45,54.1)
  Bottom Layer w0.3: v3(10.9,62.15) 12.1,63.35 C1.2 ; C18.1 18.7,59.3 v2(18.75,59.25) ; v2(29,62.8) 29.05,62.75 C17.1 ; 30.2,67.1 29.85,67.1 v2(29,66.25) 29.55,65.7 30.35,65.7 C2.1@30.55,65.5 ; v1(36.8,58.7) 36.8,58.45 37.3,57.95 C11.1 ; v1(38.9,55.25) 39.5,55.25 ; C10.1@40.55,55.5 C10.1 39.75,55.5 39.5,55.25 ; C16.1@40.9,57.2 39.5,55.8 39.5,55.25 ; R4.1 41.8,43.35 41.8,43.4 v1(43.3,43.4) ; R2.1 43.65,38.95 v1(44.6,39.9)
  other v2: 82.1,49.8
LED1: DL1.2 U2.48 | length 19.2
  Top Layer w0.152: U2.48 45.475,58.725
  Top Layer w0.3: DL1.2 43,65.75 44,64.75 48.25,64.75 48.7,64.3 48.7,59.2 48.225,58.725 45.475,58.725
LED2: DL2.2 U2.47 | length 19.4
  Top Layer w0.152: U2.47 45.475,58.225
  Top Layer w0.3: DL2.2 44.5,65.75 45,65.25 48.5,65.25 49.25,64.5 49.25,58.75 48.725,58.225 45.475,58.225
LED3: DL3.2 U2.44 | length 20.3
  Top Layer w0.152: U2.44 45.725,56.725 45.75,56.75
  Top Layer w0.3: 45.75,56.75 49.25,56.75 49.8,57.3 49.8,64.7 48.75,65.75 46.5,65.75 46,66.25 DL3.2
NetC2_2: C2.2 U2.62 Y1.3 | length 8.1
  Top Layer w0.152: v2(35.3,62.7) 36,62 U2.62
  Bottom Layer w0.2: C2.2@31.95,65.5 32.15,65.7 32.7,65.7 33.6,64.8 Y1.3 34.8,63.2 v2(35.3,62.7)
NetC3_2: C3.2 U2.61 Y1.1 | length 14.5
  Top Layer w0.152: U2.61 36.5,61.535 36.8,61.835 36.8,62.135 v2(36.8,62.7)
  Bottom Layer w0.2: C3.2@31.95,66.75 32.3,67.1 35.65,67.1 36,66.75 ; v2(36.8,62.7) 36,63.5 36,66.75 ; Y1.1 37.15,69.25 37.15,67.15 36.75,66.75 36,66.75
NetC17_2: C17.2 L2.1 R22.2 U2.64 | length 18.8
  Top Layer w0.152: v2(33.8,62.7) 34.05,62.7 35,61.75 U2.64
  Bottom Layer w0.3: R22.2 26.3,60.75 ; L2.1 26.3,60.75 ; C17.2 33.75,62.75 33.75,64 33.25,64.5 27,64.5 26.5,64 26.3,63.8 26.3,60.75
NetC18_2: C18.2 R22.1 | length 2.4
  Bottom Layer w0.3: C18.2 R22.1
NetD2_1: D2.1 L1.2 | length 5.4
  Top Layer w0.9: v2(17.1,69.7) L1.2
  Bottom Layer w0.3: D2.1@17.7,67.6 D2.1@17.85,67.45
  Bottom Layer w0.75: D2.1 17,67.6 D2.1@17.1,67.7 ; D2.1@17.7,67.6 D2.1@18.4,68.3
  Bottom Layer w0.9: D2.1@17.1,67.7 v2(17.1,69.7)
NetDL1_1: DL1.1 R7.1 | length 1.8
  Top Layer w0.3: DL1.1 R7.1
NetDL2_1: DL2.1 R8.1 | length 1.8
  Top Layer w0.3: DL2.1 R8.1
NetDL3_1: DL3.1 R9.1 | length 1.8
  Top Layer w0.3: DL3.1 R9.1
NetH3_2: H3.2 U2.3 | length 31.7
  Top Layer w0.152: v1(31.7,56.876) 31.7,56.951 32.474,57.725 U2.3 U2.3@33.25,57.7
  Top Layer w0.5: H3.2 v1(17,50.1)
  Bottom Layer w0.5: v1(17,50.1) 19.1,50.1 25.876,56.876 v1(31.7,56.876)
NetH3_3: H3.3 Q1.2 | length 7.5
  Top Layer w0.75: H3.3 Q1.2@12.3,47.56
NetR1_1: EXTCLK.1 R1.1 R2.2 U1.2 | length 18.7
  Top Layer w0.152: U1.2 39.8,38.3 40.3,38.8 v1(40.3,39.1)
  Top Layer w0.3: v1(42.5,37.5) 43.7,37.5 45.1,36.1 45.1,34 47.9,31.2 EXTCLK.1@50.1,31.2
  Bottom Layer w0.3: v1(40.3,39.1) 41.95,39.1 R2.2 ; v1(42.5,37.5) 42.15,37.85 R2.2 ; R1.1 42.5,40.3 42.15,39.95 R2.2
NetR1_2: R1.2 U2.27 | length 14
  Top Layer w0.152: U2.27 40,50.5
  Top Layer w0.3: 40,50.5 v1(40.8,51.3)
  Bottom Layer w0.3: v1(40.8,51.3) 41.4,51.3 44,48.7 R1.2
NetR3_1: R3.1 R4.2 RESET.1 U1.3 | length 20.1
  Top Layer w0.152: U1.3 39.1,38.8 39.3,39 v1(39.3,39.6)
  Top Layer w0.3: RESET.1 v1(45.9,31.8)
  Bottom Layer w0.3: R4.2 R3.1 39.7,40.5 39.3,40.1 v1(39.3,39.6) 39.3,38.1 42.1,35.3 42.1,33.3 43.6,31.8 v1@45.8,31.8
NetR3_2: R3.2 U2.19 | length 11.1
  Top Layer w0.152: 36,48.4 U2.19
  Top Layer w0.3: 36,48.4 36,42.6 36.6,42 v1(38.9,42)
  Bottom Layer w0.3: v1@38.85,42.2 R3.2@39.6,42.95
NetR5_1: R5.1 TDO.1 U1.4 U2.30 | length 25.9
  Top Layer w0.152: U1.4 38.4,38.3 38.3,38.4 v1(38.3,39.2) ; v1(41.9,47.5) 41.566,47.834 41.566,48 ; 42,50.6 41.5,50.1 U2.30 ; U2.30 41.566,48 ; U2.30 41.566,49.384 41.566,48
  Top Layer w0.3: 42,50.6 46.1,50.6 47.4,49.3 TDO.1
  Bottom Layer w0.3: v1(38.3,39.2) 38.2,39.3 38.2,44.6 39.1,45.5 41.05,45.5 R5.1 41.683,46.367 41.9,46.584 v1(41.9,47.5)
NetR5_2: R5.2 R6.2 U2.32 | length 7.1
  Top Layer w0.152: U2.32 42.5,49.1 v1(43.2,48.4)
  Bottom Layer w0.3: R6.2@40.5,44.75 R5.2 42.15,44.75 43.2,45.8 v1(43.2,48.4)
NetR6_1: R6.1 TDI.1 U1.5 U2.29 | length 23.4
  Top Layer w0.152: v1(37.2,39.3) 37.3,39.2 U1.5 ; v1@41,47.7 U2.29
  Top Layer w0.3: TDI.1@32.9,44.6 32.9,44.4 33,44.3 v1(33,41.3) ; v1(33,39.1) 33.2,39.3 v1(37.2,39.3)
  Bottom Layer w0.3: v1(33,39.1) v1(33,41.3) ; v1(37.2,39.3) 37.3,39.3 37.5,39.5 37.5,44.7 39.05,46.25 R6.1 40.4,46.85 40.9,47.35 40.8,47.45 v1(40.8,47.5)
NetR10_1: R10.1 U2.16 | length 7.6
  Top Layer w0.152: 31.925,51.225 U2.16
  Top Layer w0.3: R10.1 v1(28,49.5) ; v1(29.2,51.2) 31.9,51.2
  Bottom Layer w0.3: v1(28,49.5) 28.3,49.5 29.2,50.4 v1(29.2,51.2)
NetR10_2: R10.2 SW1.1 | length 5
  Top Layer w0.3: SW1.1 23.5,50 24,49.5 R10.2
NetR11_2: R11.2 U2.57 | length 2.8
  Top Layer w0.152: R11.2@38.2,63.2 38.2,62.4 38.5,62.1 U2.57
NetR12_2: R12.2 U2.56 | length 3.3
  Top Layer w0.152: U2.56 39,62.1 39.6,62.7 R12.2@39.6,63.6
NetR13_2: R13.2 R14.2 U2.31 | length 38.1
  Top Layer w0.152: U2.31 42,48.427 42.209,48.218 42.209,48.206 42.307,48.107
  Top Layer w0.3: 42.307,48.107 42.915,47.5 66.75,47.5 67.25,48 v2(67.25,49.75) ; R14.2@66,53.75 67,53.75 67.25,54 v2(67.25,54.75) 67.25,55.25 67.5,55.5 R13.2
  Bottom Layer w0.3: v2(67.25,49.75) v2(67.25,54.75)
NetTP2_1: D6.1 U1.19 U2.37 | length 26.5
  Top Layer w0.152: U1.19@42.1,35.5 v1(43.1,35.5) ; U2.37 45.625,53.225 v1(45.8,53.4)
  Top Layer w0.3: U1.19 U1.19@42.1,35.5 ; v1(46,45.4) 49.7,45.4 49.9,45.6 D6.1
  Bottom Layer w0.3: v1(43.1,35.5) 43.4,35.5 46.2,38.3 46.2,45.2 v1(46,45.4) 46,53.2 v1(45.8,53.4)
NetTP3_1: D7.1 U1.20 U2.38 | length 27.8
  Top Layer w0.152: U1.20@42.1,36.6 v1(43.1,36.6) ; v1(42.6,53.7) 44.25,53.7 U2.38
  Top Layer w0.3: U1.20 U1.20@42.1,36.6 ; v1(45.1,42.2) 49.3,42.2 49.7,41.8 49.9,42 D7.1
  Bottom Layer w0.3: v1(42.6,53.7) 42.6,51.2 45.1,48.7 v1(45.1,42.2) 45.6,41.7 45.6,38.6 43.6,36.6 v1(43.1,36.6)
NetTP5_1: U1.8 U2.41 VD.1 | length 48.4
  Top Layer w0.152: 35,35.1 U1.8 ; U2.41 44.975,55.225 45.2,55 45.5,55
  Top Layer w0.3: 35,35.1 34.7,35.1 33.6,34 33.6,31.3 35.8,29.1 42,29.1 44.1,31.2 v1(44.1,33.5) ; 45.5,55 v1(46.9,55) ; v1(47.7,38.3) 49.7,38.3 49.9,38.5 VD.1
  Bottom Layer w0.3: v1(44.1,33.5) 47.7,37.1 v1(47.7,38.3) 47.7,53.4 46.9,54.2 v1(46.9,55)
NetTP6_1: HD.1 U1.9 U2.42 | length 46.4
  Top Layer w0.152: 35.093,34.2 U1.9 ; U2.42 45.875,55.725 v1(46,55.6)
  Top Layer w0.3: 35.093,34.2 34.3,33.407 34.3,31.8 36.2,29.9 41.5,29.9 43.2,31.6 v1(43.2,34.2) ; v1(46.1,37.1) 48.35,34.85 48.35,34.8 HD.1
  Bottom Layer w0.3: v1(43.2,34.2) v1(46.1,37.1) 46.9,37.9 46.9,53.3 46,54.2 v1(46,55.6)
NetTP7_1: DCLK.1 U1.10 U2.22 | length 25.9
  Top Layer w0.152: U1.10@35.9,33.3 36.208,33.608 ; v1(37.1,48.1) 37.1,48.4 37.5,48.8 U2.22
  Top Layer w0.3: DCLK.1 31.3,35 31.6,34.7 v1(32.8,34.7) ; v1(34.25,38.15) 34.85,37.55 35.969,37.55 36.35,37.169 36.35,33.75 36.208,33.608 ; v1(35.2,32.7) 35.2,32.8 U1.10 U1.10@35.9,33.3
  Bottom Layer w0.3: v1(32.8,34.7) 34.8,32.7 v1(35.2,32.7) ; v1(34.25,38.15) 34.1,38.3 34.1,45.4 36.8,48.1 v1(37.1,48.1)
NetTP14_1: TP14.1 U2.20 | length 5.2
  Top Layer w0.152: U2.20 36.5,46.6 37.6,45.5 TP14.1@37.6,44.7
NetTP15_1: TP15.1 U2.28 | length 4.8
  Top Layer w0.152: TP15.1@40.5,45.5 40.5,46.951 40.2,47.251 40.2,47.749 40.5,48.049 U2.28
  Top Layer w0.3: TP15.1@40.5,45.5 TP15.1@40.9,45.1
NetTP28_1: 28EN.1 U2.10 U4.3 | length 24.2
  Top Layer w0.152: v1@31.693,54.6 32.068,54.225 U2.10
  Top Layer w0.3: 28EN.1 20.1,46.8 25.4,46.8 26,46.2 v1(26.1,46.2) 26.1,45 U4.3 ; v1(31.5,54.5) 31.593,54.5 v1@31.693,54.6
  Bottom Layer w0.3: v1(26.1,46.2) 26.1,49.6 31,54.5 v1(31.5,54.5)
NetTP29_1: 15EN.1 U2.9 U5.3 | length 25.4
  Top Layer w0.152: 31.83,55.1 32.202,54.727 ; 32.2,54.725 U2.9
  Top Layer w0.3: 15EN.1 19.15,39.3 19.15,39.35 20.5,40.7 20.5,43.7 U5.3@21.75,44.95 ; v1(21.7,46.2) 21.7,45 U5.3@21.75,44.95 ; U5.3 U5.3@21.75,44.95 ; U5.3@21.85,44.85 U5.3@21.75,44.95 ; v1(30.1,54.7) 30.5,55.1 31.83,55.1
  Bottom Layer w0.3: v1(21.7,46.2) 30.1,54.6 v1(30.1,54.7)
NetU1_11: U1.11 U2.11 | length 29.5
  Top Layer w0.152: v1(31.5,53.7) U2.11@33.225,53.7 ; v1(36,31.2) 36.3,31.2 U1.11
  Bottom Layer w0.3: v1(31.5,53.7) 31.352,53.7 29.8,52.148 29.8,36.1 34.7,31.2 v1(36,31.2)
NetU1_12: U1.12 U2.14 | length 26.2
  Top Layer w0.152: v1(31.6,52.6) 31.975,52.225 U2.14 ; v4(37.3,32.9) 37.8,32.4 U1.12
  Bottom Layer w0.3: v1(31.6,52.6) 31.551,52.6 30.7,51.749 30.7,39.1 36.6,33.2 37.1,33.2 37.3,33 v4(37.3,32.9)
NetU1_13: U1.13 U2.15 | length 25
  Top Layer w0.152: v1(31.6,51.8) 31.675,51.725 U2.15 ; v4(38.4,32.864) 38.4,32.4 38.7,32.1 U1.13
  Bottom Layer w0.3: v1(31.6,51.8) 31.6,39.3 37.25,33.65 37.399,33.65 37.9,33.149 37.9,33 38.036,32.864 v4(38.4,32.864) v4@38.473,32.864
NetU1_14: U1.14 U2.23 | length 21.2
  Top Layer w0.152: U2.23 38.017,49.433 38.017,48.183 v1(38.2,48) ; U1.14 v4@39.6,32.8
  Top Layer w0.3: v4(39.5,32.9) v4@39.6,32.8
  Bottom Layer w0.3: v1(38.2,48) 38,48 34.951,44.951 34.9,44.951 34.9,37.5 v4(39.5,32.9)
NetU1_17: U1.17 U2.25 | length 21.4
  Top Layer w0.152: v1(37.8,46.7) 39,47.9 U2.25 ; v4(40.9,33.9) 41.9,33.9 42,34 U1.17 U1.17@42,33.7
  Bottom Layer w0.3: v1(37.8,46.7) 35.7,44.6 35.7,37.5 39.3,33.9 v4(40.9,33.9)
NetU1_18: U1.18 U2.26 | length 20.1
  Top Layer w0.152: v1@39.5,47.3 U2.26 ; v4(40.9,34.7) U1.18
  Top Layer w0.3: v1(39.45,47.25) v1@39.5,47.3
  Bottom Layer w0.3: v1(39.45,47.25) 39.486,47.25 39.5,47.236 39.364,47.1 39.264,47.2 36.5,44.436 36.5,37.6 39.4,34.7 v4(40.9,34.7)
NRST: H4.15 R15.1 SW2.1 TP18.1 U2.39 | length 34.5
  Top Layer w0.152: U2.39 45.725,54.225
  Top Layer w0.3: 45.725,54.225 57.975,54.225 58.75,55 SW2.1 ; v2(53.5,57.5) 53.5,60.75 54.25,61.5 55.25,61.5 ; R15.1 55.25,61.5 ; TP18.1 55.25,61.5
  Top Layer w0.5: TP18.1 55.25,66.5 55.52,66.77 H4.15
  Bottom Layer w0.3: v2(53.5,54.25) v2(53.5,57.5)
PWR: Q1.1 U2.4 | length 29.5
  Top Layer w0.152: U2.4 33.25,57.2 v1(34.7,57.2)
  Top Layer w0.3: Q1.1@13.6,47.5 29.9,47.5 v1(32.3,49.9)
  Bottom Layer w0.3: v1(32.3,49.9) 33.2,50.8 33.2,55.7 v1(34.7,57.2)
SCL: H2.5 R13.1 TP17.1 U2.36 | length 49.6
  Top Layer w0.152: U2.36 45.725,52.725
  Top Layer w0.3: 45.725,52.725 69,52.725 ; R13.1 69,52.725 ; H2.5 v1(71.5,53.615) 70.865,53.615 69.975,52.725 69,52.725 ; v1(74.5,63.3) TP17.1
  Bottom Layer w0.3: v1(71.5,53.615) 71.5,60.3 v1(74.5,63.3)
SDA: H2.7 R14.1 SDA.1 U2.43 | length 34.9
  Top Layer w0.152: U2.43 45.725,56.225
  Top Layer w0.3: 45.725,56.225 55.725,56.225 56.25,56.75 56.25,57.5 56.7,57.95 61.3,57.95 62,57.25 62,56.75 62.595,56.155 63.3,56.155 ; SDA.1 63.3,54.5 63.3,56.155 ; R14.1 65.8,56.155 ; H2.7 63.3,56.155
TCK: H4.9 R17.1 TP20.1 U2.53 | length 34.1
  Top Layer w0.152: U2.53 40.5,59.465 40.965,59
  Top Layer w0.3: 40.965,59 43,59 43.5,59.5 46.25,59.5 v2(46.75,60) ; R17.1 TP20.1
  Top Layer w0.5: TP20.1 62.75,66.25 63.14,66.64 H4.9
  Bottom Layer w0.3: v2(46.75,60) 60.75,60 61,60.25 61,61 61.25,61.25 v2(62.75,61.25)
TDI: H4.5 R19.1 TP22.1 U2.33 | length 46.2
  Top Layer w0.152: U2.33 45.975,51.225 46,51.25
  Top Layer w0.3: 46,51.25 v2(69.5,51.25) ; R19.1 v2(70.25,61.25) TP22.1
  Top Layer w0.5: H4.5 68.25,69.299 68.25,66.75 68.75,66.25 70,66.25 70.25,66 TP22.1
  Bottom Layer w0.3: v2(69.5,51.25) 70.25,52 v2(70.25,61.25)
TDO: H4.13 R16.1 TP19.1 U2.49 | length 28.5
  Top Layer w0.152: U2.49 42.5,61.535 42.715,61.75 43.25,61.75
  Top Layer w0.3: 43.25,61.75 45.25,61.75 45.5,61.5 v2(46.75,61.5) ; R16.1 v2(59,61.25) TP19.1
  Top Layer w0.5: H4.13 58.06,66.81 59,65.87 TP19.1
  Bottom Layer w0.3: v2(46.75,61.5) 48.5,61.5 49.4,62.4 58.6,62.4 59,62 v2(59,61.25)
TMS: H4.7 R18.1 TP21.1 U2.51 | length 38.4
  Top Layer w0.152: U2.51 41.5,61.75
  Top Layer w0.3: 41.5,61.75 41.25,62 41.25,62.75 41.5,63 45,63 v2(46.75,63) ; R18.1 v2(66.5,61.25) TP21.1
  Top Layer w0.5: H4.7 65.75,69.259 65.75,66.75 66.5,66 TP21.1
  Bottom Layer w0.3: v2(46.75,63) 65.75,63 66.5,62.25 v2(66.5,61.25)
"USB DETECT": R20.1 R21.2 U2.35 | length 44.8
  Top Layer w0.3: R21.2 19.75,68.25 20,68 21.75,68 ; R20.1 21.75,68 ; v2(24,62.5) 24,51 24.5,50.5 33.751,50.5 34.3,51.049 ; v2(24,66) 24,67.5 23.5,68 21.75,68 ; 34.3,51.05 35.475,52.225 U2.35
  Bottom Layer w0.3: v2(24,62.5) v2(24,66)
USB_N: H1.2 R12.1 TP12.1 | length 38.1
  Top Layer w0.381: H1.2 9.94,64.55 10.023,64.468 14,64.468 ; TP12.1@14,67 14,64.468 ; 39.6,65.5 39.6,66 37.35,68.25 28.352,68.25 27.5,67.398 27.5,65.25 26.718,64.468 14,64.468
USB_P: H1.3 R11.1 TP13.1 | length 36.4
  Top Layer w0.381: H1.3 9.94,63.75 10.023,63.833 14,63.833 ; TP13.1 14,63.833 ; 38.25,65.5 38.25,66.25 36.885,67.615 28.615,67.615 28.135,67.135 28.135,64.987 26.981,63.833 14,63.833
VBUS: C1.1 H1.1 L1.1 R20.2 TP24.1 | length 27.6
  Top Layer w0.3: H1.1 10.1,65.35 ; TP24.1 12,72.25 12.25,72 12.25,69.75 ; v2(21.7,72.7) 21.75,72.65 R20.2
  Top Layer w0.9: 10.1,65.35 10.75,66 10.75,69 11.5,69.75 12.25,69.75 L1.1@13.8,71.3
  Bottom Layer w0.3: v2(10.8,66.7) 11.3,66.7 12.2,65.8 C1.1@12.2,65.4 ; v2(12.2,71.3) 20.3,71.3 v2(21.7,72.7)
VDDOUT: C13.2 C14.2 C15.2 C16.2 L2.2 TP26.1 U2.8 U2.12 U2.24 U2.54 | length 42.5
  Top Layer w0.152: TP26.1 33.174,53.174 U2.12 v1@34.975,53.225 ; U2.8 v1@34.975,55.225 ; U2.24 v1(38.5,51) ; v1(40,59) U2.54
  Top Layer w0.254: v1@34.975,53.225 v1(35,53.25) ; v1@34.975,55.225 v1(35,55.25)
  Bottom Layer w0.254: C14.2@36.05,53.25 v1(35,53.25) ; C13.2@36.05,55.25 v1(35,55.25) v1(35,53.25) ; C15.2@40.05,52.5 C15.2 38.75,52.5 38.5,52.25 v1(38.5,51) 36,51 35,52 v1(35,53.25)
  Bottom Layer w0.3: L2.2 32.75,60.75 35.6,57.9 35.6,56.85 35,56.25 ; v1(35,55.25) 35,56.25 ; v1(40,59) 40,58.5 ; C16.2 40,58.5 ; 35,56.25 39.25,56.25 40,57 40,58.5
pads on no net: H1.4 H1.MH1 H1.MH2 H2.3 H2.4 H2.9 H2.10 H4.3 H4.11 H4.17 H4.19 MT1.1 MT2.1 MT3.1 MT4.1 U2.5 U2.6 U2.13 U2.21 U2.34 U2.52 U2.59 U2.63 Y1.2 Y1.4

## Polygon pours and split planes (outlines as drawn)
GND on Gnd (split plane): 84.49,0.51 0.51,0.51 0.51,79.49 84.49,79.49
+5IN on DC Power (split plane): 84.49,41.749 75.249,41.749 75.249,44.9 75.249,76.8 75.239,76.849 75.211,76.891 75.169,76.919 75.12,76.929 75.07,76.919 75.028,76.891 75.018,76.876 75,76.879 24.6,76.879 24.55,76.87 24.535,76.859 24.52,76.87 24.471,76.879 24.421,76.87 24.379,76.842 24.351,76.8 24.341,76.75 24.341,70.824 15.608,62.092 15.58,62.05 15.571,62 15.571,45.5 15.58,45.45 15.608,45.408 15.65,45.38 15.7,45.371 29.171,45.371 29.171,41.729 9.879,41.729 9.879,79.49 84.49,79.49
+3V3 on DC Power (split plane): 9.621,41.6 9.63,41.55 9.658,41.508 9.7,41.48 9.75,41.471 29.3,41.471 29.35,41.48 29.392,41.508 29.42,41.55 29.429,41.6 29.429,45.5 29.42,45.55 29.392,45.592 29.35,45.62 29.3,45.629 15.829,45.629 15.829,61.946 24.562,70.679 24.59,70.721 24.6,70.771 24.6,76.621 74.99,76.621 74.99,44.9 74.99,41.62 75,41.57 75.028,41.528 75.07,41.5 75.12,41.49 84.49,41.49 84.49,0.51 0.51,0.51 0.51,79.49 9.621,79.49

## Keep-outs
Keep-Out Layer:
  lines w0.3: 1.3,56 1.3,1.3 83.7,1.3 83.7,78.7 1.3,78.7 1.3,71.25

## Other copper
DC Power (plane layer: these items are gaps in the copper):
  lines w0.254: 0.7,41.6 0.7,44.9 ; 9.75,80 9.75,41.6 29.3,41.6 29.3,45.5 15.7,45.5 15.7,62 24.471,70.771 24.471,76.75 ; 24.6,76.75 75,76.75 ; 75.12,76.8 75.12,44.9 75.12,41.62 84.68,41.62 ; 85,41.6 85,45

## Silkscreen, mask and mechanical layers (free items; w line width, h text height)
Top Overlay:
  text "L. Duggal / T. Hu" at 57,29.5 h2
  text "Team 7 - Camera Board" at 10.9,23.5 h3
PCB Boundary:
  the board outline again, w0.3
Drill Drawing:
  text ".LEGEND" at 90.08,5.08 h0.8
  text "Drill Drawing." at 90.08,2.54 h0.8

## Dimensions
0,0 to 0,80 on Dimension
0,0 to 85,0 on Dimension

## Text inside footprints (layer, text, board x,y; h text height)
H1: Dimension "PCB Edge" at 0.068,67.786 h0.25 r270
H3: Top Overlay "1" at 0.355,52.005 h0.8